# Altium PCB Transmitter_PCB.PcbDoc
Units mm, origin at the board's own origin, x right, y up, seen from the top; angles counter-clockwise.
Board outline 300 x 300 mm, 2 copper layers (Top Layer, Bottom Layer), stack 1.58 mm thick; 9 components, 18 nets, 53 pads, 20 vias.
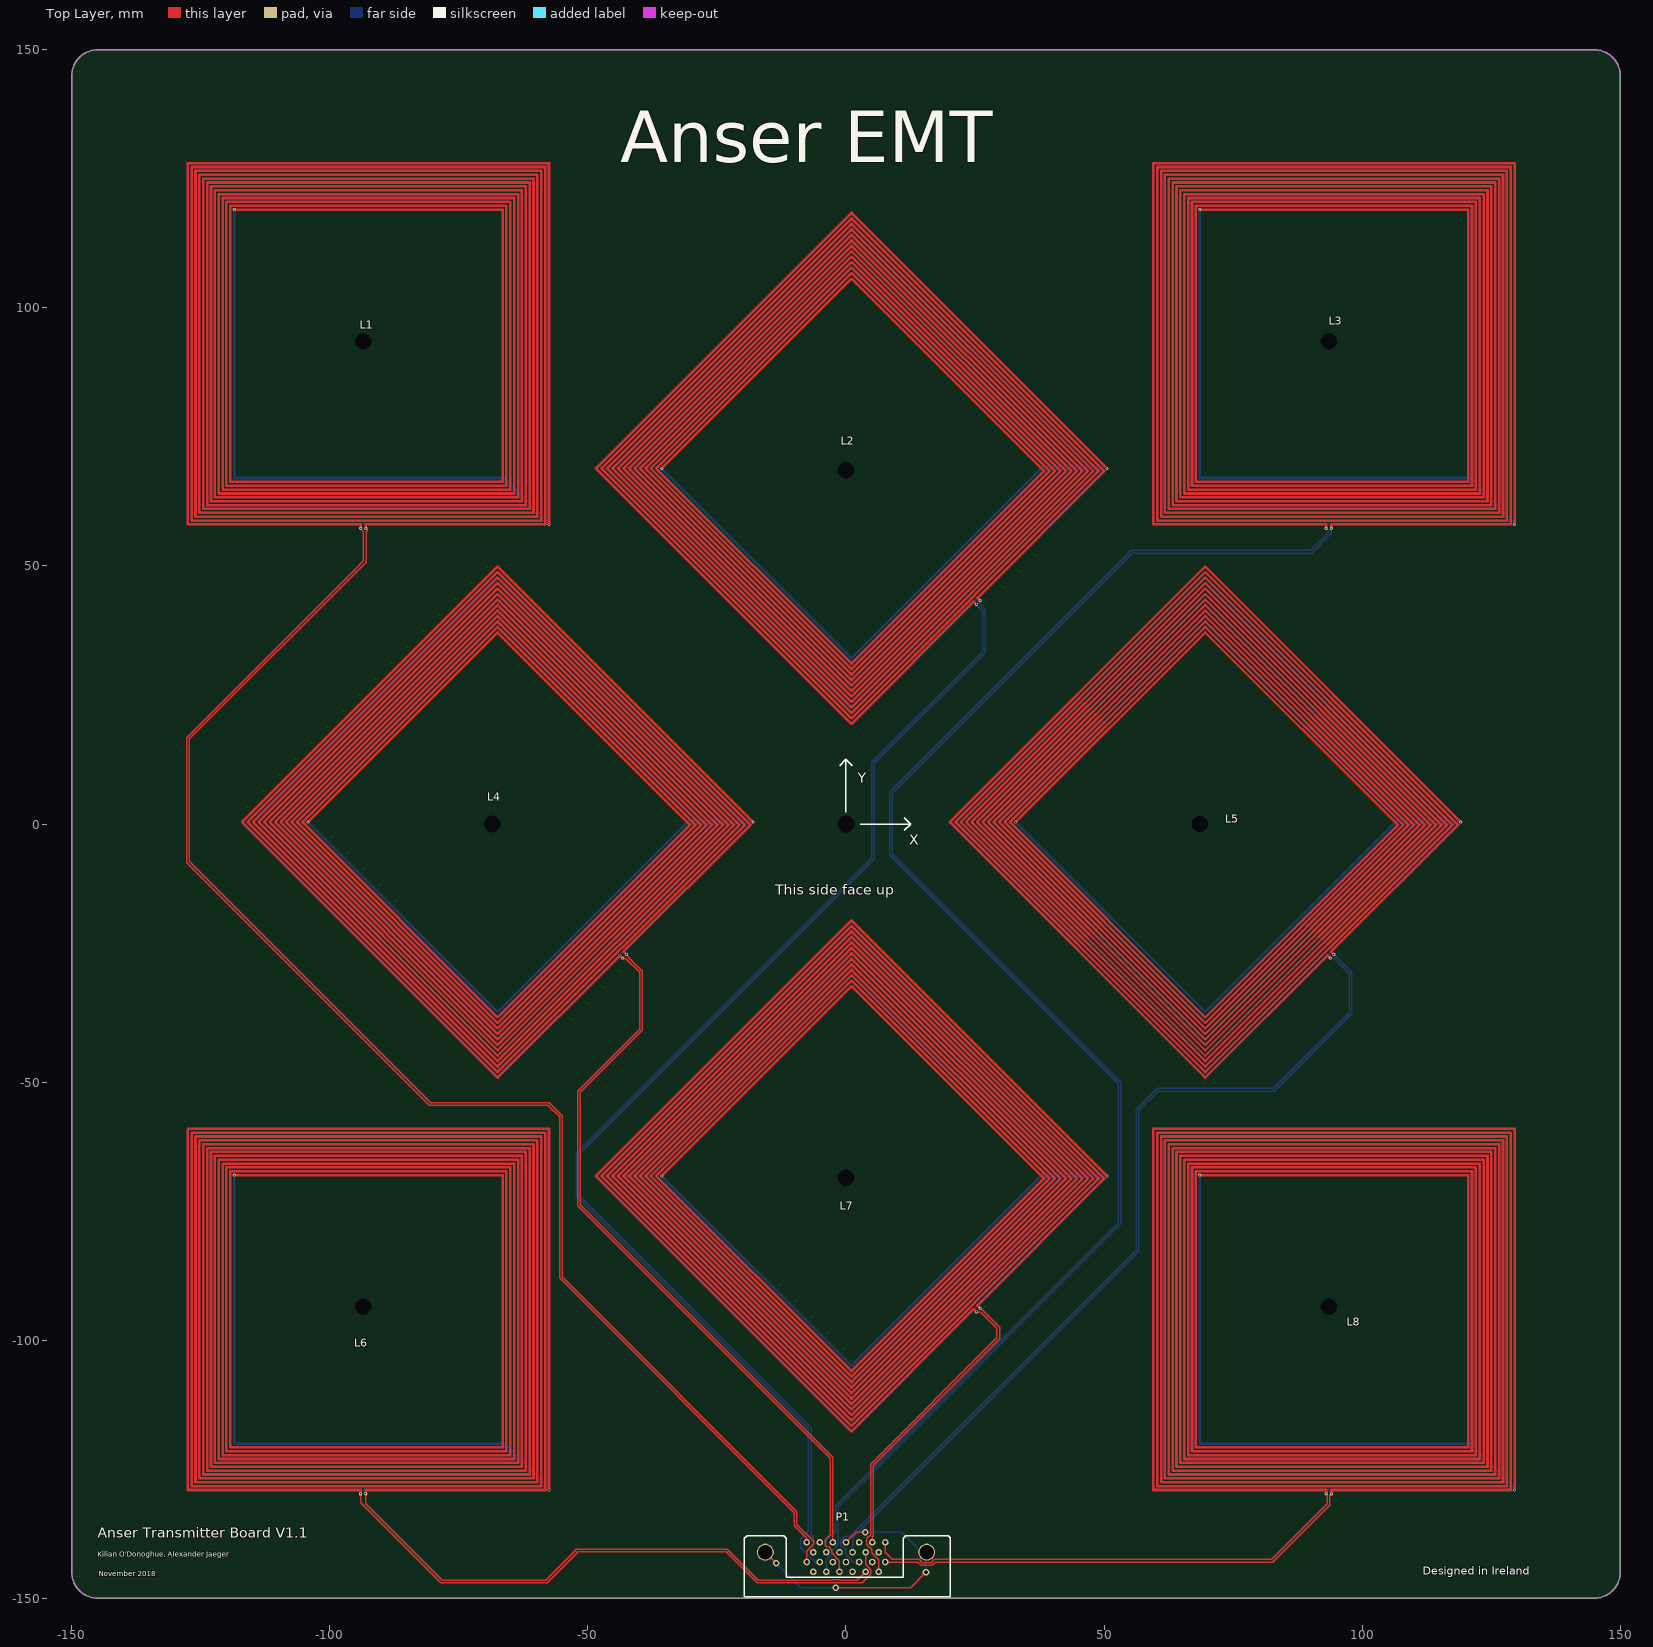
[diagram p0: Top Layer view]
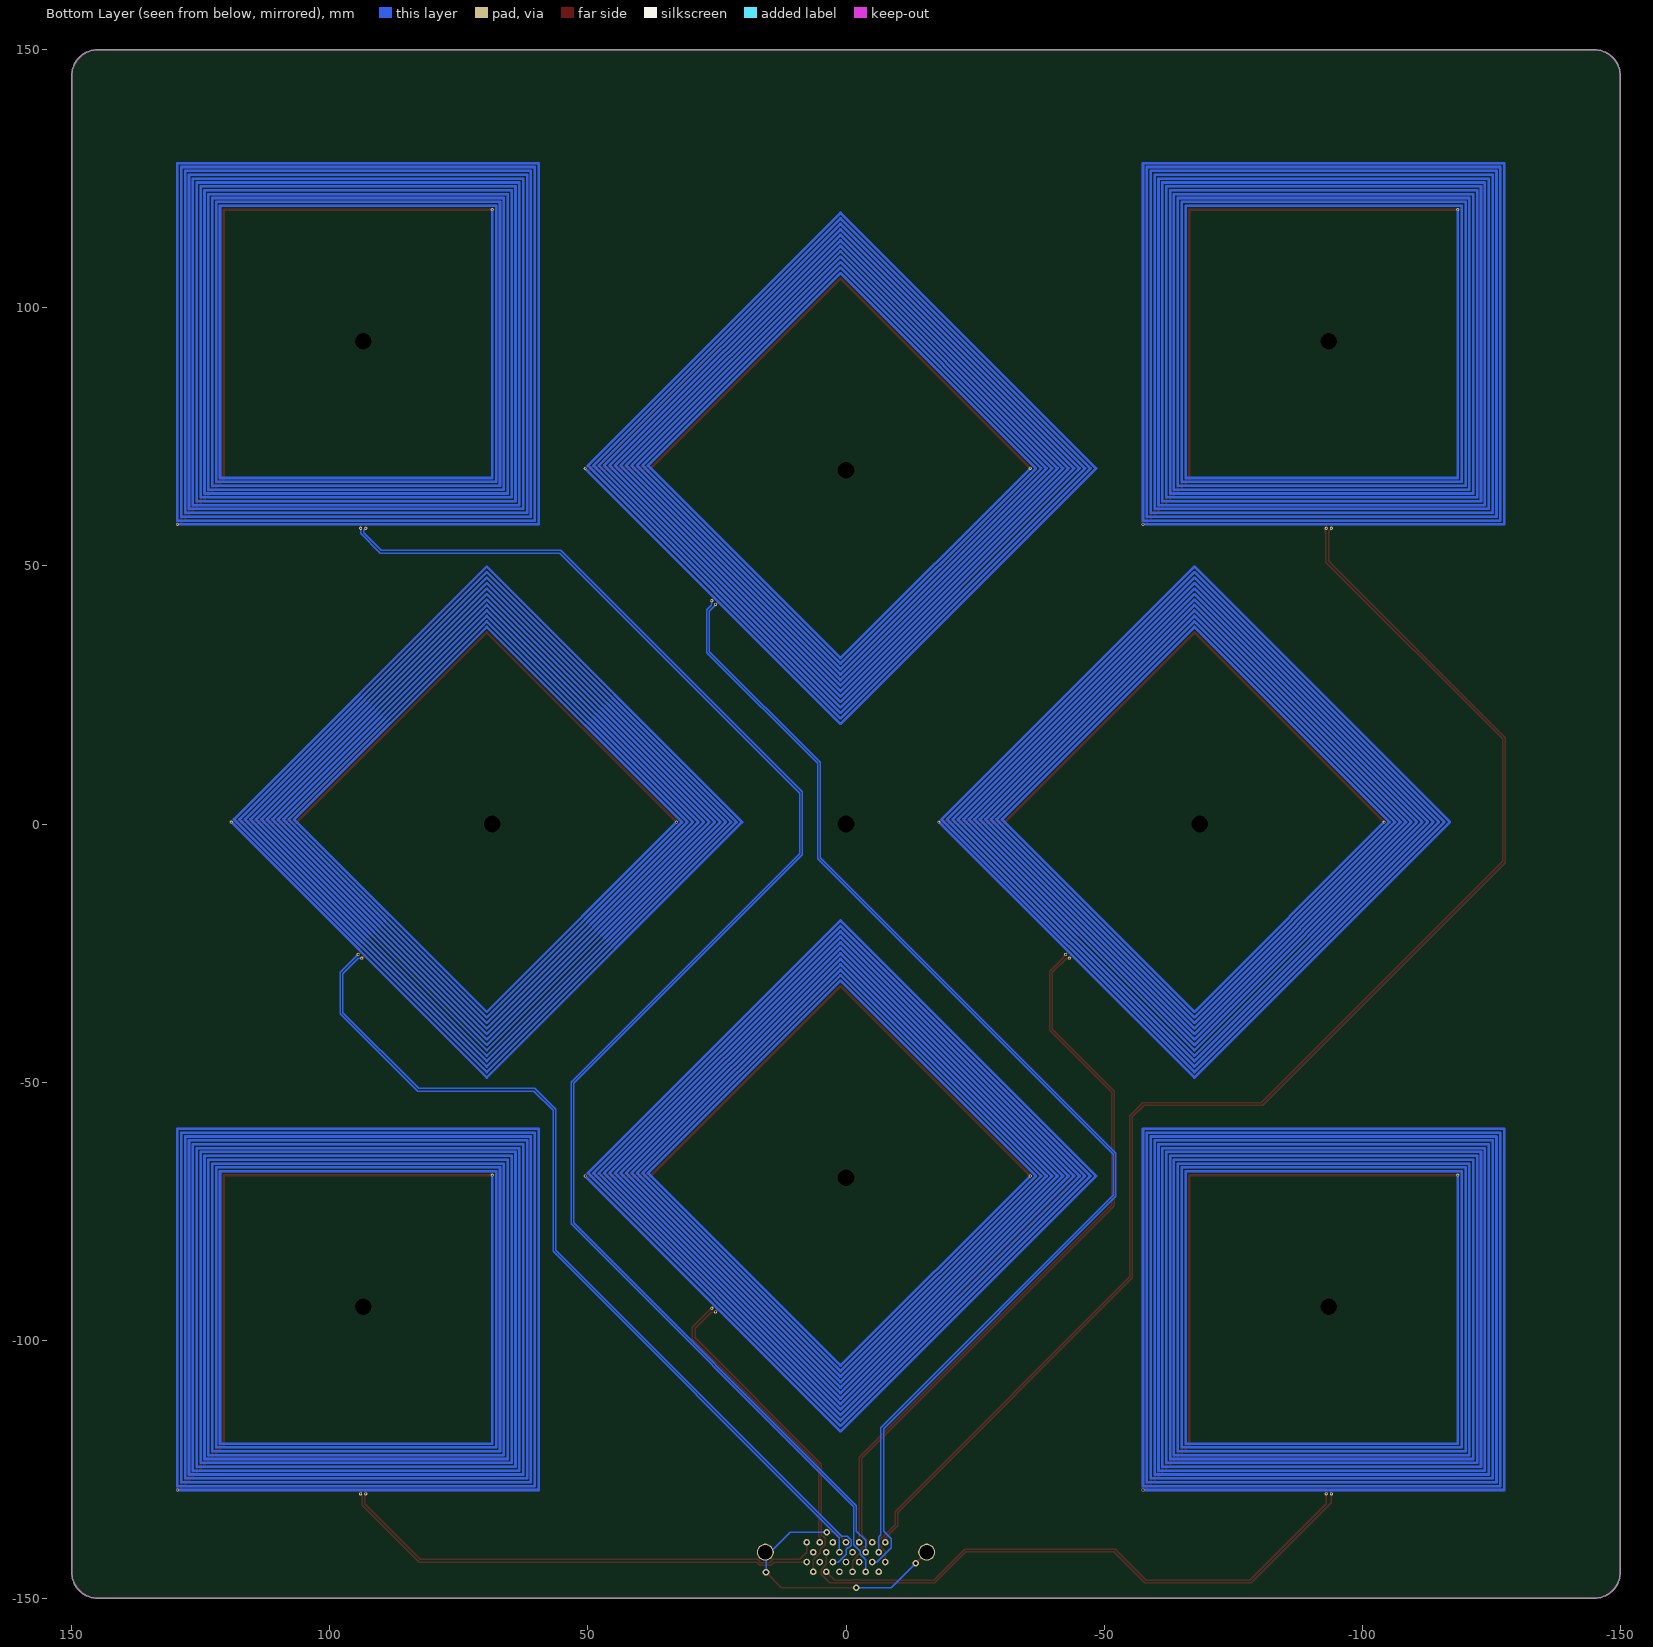
[diagram p1: Bottom Layer view, seen from below]

## Layer stack, top to bottom
Top Solder: solder mask 0.0102, Solder Resist, Dk 3.5
Top Layer: signal copper 0.0356
Dielectric 1: dielectric 1.5087, FR-4, Dk 4.8
Bottom Layer: signal copper 0.0356
Bottom Solder: solder mask 0.0102, Solder Resist, Dk 3.5

## Board outline
-145,-150 cw(c-145,-145) -150,-145 -150,145 cw(c-145,145) -145,150 145,150 cw(c145,145) 150,145 150,-145 cw(c145,-145) 145,-150

## Design rules (kind name [scope] priority, off if disabled: settings)
Clearance [All] p1: gap=0.254 ignorepadtopadclearanceinfootprint=FALSE except(0: Arc-Hole Track-Hole SMDPad-Hole THPad-Hole Via-Hole Fill-Hole Poly-Hole Region-Hole Text-Hole)
PolygonConnect [All] p1: connectstyle=Relief reliefconductorwidth=0.254 reliefentries=4 polygonreliefangle="90 Angle" airgapwidth=0.254
RoomDefinition Transmitter_PCB [InComponentClass('Transmitter_PCB')] p1: confinementstyle=ConfineIn formatcopy=TRUE lockcomponents=FALSE outline -175.4,-175.4 161.25,-175.4 161.25,161.5 -175.4,161.5
RoutingVias [All] p1: holewidth=0.711 width=1.27 viastyle="Through Hole" minholewidth=0.711 minwidth=1.27 maxholewidth=0.711 maxwidth=1.27
SolderMaskExpansion [All] p1: expansion=0.102
Width [All] p1: maxlimit=0.254 minlimit=0.254 preferedwidth=0.254
30 further rules are at their usual default settings.

## Components (designator, comment, footprint, x,y, rotation, side; value= is the part's Value field where it differs from the comment)
L1 "" TRANSMITTER_COIL_UCC_ORIGINAL -93.543,93.543 r0 top
L2 "" TRANSMITTER_COIL_UCC_ORIGINAL 0,68.55 r45 top
L3 "" TRANSMITTER_COIL_UCC_ORIGINAL 93.543,93.543 r0 top
L4 "" TRANSMITTER_COIL_UCC_ORIGINAL -68.55,0 r45 top
L5 "" TRANSMITTER_COIL_UCC_ORIGINAL 68.55,0 r45 top
L6 "" TRANSMITTER_COIL_UCC_ORIGINAL -93.543,-93.543 r0 top
L7 "" TRANSMITTER_COIL_UCC_ORIGINAL 0,-68.55 r45 top
L8 "" TRANSMITTER_COIL_UCC_ORIGINAL 93.543,-93.543 r0 top
P1 "Connector3M_26Pos" Connector_3M_26Pos 0,-143 r0 top

## Footprints (in the part's own frame and the unit in brackets; to place one, negate y for a bottom-side part, rotate by r counter-clockwise, add the part's x,y. Pads: shape width x height; smd on the part's side, far side on the other; paste and mask are expansions set on the pad)
Connector_3M_26Pos [mil] "Connector_3M_26Pos"
  round 130 hole 112: 0(615.5,75) 27(-615.5,75)
  round 50 hole 28: 1(300,150) 2(250,75) 3(200,150) 4(150,75) 5(100,150) 6(50,75) 7(0,150) 8(-50,75) 9(-100,150) 10(-150,75) 11(-200,150) 12(-250,75) 13(-300,150) 14(300,0) 15(250,-75) 16(200,0) 17(150,-75) 18(100,0) 19(50,-75) 20(0,0) 21(-50,-75) 22(-100,0) 23(-150,-75) 24(-200,0) 25(-250,-75) 26(-300,0)
  silkscreen extent -775,-265 795,200, body extent -730,-475 730,185, height 371
TRANSMITTER_COIL_UCC_ORIGINAL [mil] "Original 70mm coil, 0.5mm trace width, 0.25mm separation"
  round 24 hole 12: 1(19.68,-1427.17) 2(-19.69,-1427.17)
  Top Layer lines w19.68: -984.25,1003.94 1062.99,1003.94 1062.99,-1072.83 -1013.78,-1072.83 -1013.78,1033.46 1092.52,1033.46 1092.52,-1102.36 -1043.31,-1102.36 -1043.31,1062.99 1122.05,1062.99 1122.05,-1131.89 -1072.83,-1131.89 -1072.83,1092.52 1151.57,1092.52 1151.57,-1161.42 -1102.36,-1161.42 -1102.36,1122.05 1181.1,1122.05 1181.1,-1190.94 -1131.89,-1190.94 -1131.89,1151.57 1210.63,1151.57 1210.63,-1220.47 -1161.42,-1220.47 -1161.42,1181.1 1240.16,1181.1 1240.16,-1250 -1190.94,-1250 -1190.94,1210.63 1269.68,1210.63 1269.68,-1279.53 -1220.47,-1279.53 -1220.47,1240.16 1299.21,1240.16 1299.21,-1309.06 -1250,-1309.06 -1250,1269.68 1328.74,1269.68 1328.74,-1338.58 -1279.53,-1338.58 -1279.53,1299.21 1358.27,1299.21 1358.27,-1368.11 -1309.06,-1368.11 -1309.06,1328.74 1387.8,1328.74 1387.8,-1397.64 19.68,-1397.64 19.68,-1427.17 ; -19.69,-1427.17 -19.69,-1397.64 -1338.58,-1397.64 -1338.58,1358.27 1417.32,1358.27 1417.32,-1397.64
  Bottom Layer lines w19.68: -984.25,1003.94 -984.25,-1043.31 1092.52,-1043.31 1092.52,1033.46 -1013.78,1033.46 -1013.78,-1072.83 1122.05,-1072.83 1122.05,1062.99 -1043.31,1062.99 -1043.31,-1102.36 1151.57,-1102.36 1151.57,1092.52 -1072.83,1092.52 -1072.83,-1131.89 1181.1,-1131.89 1181.1,1122.05 -1102.36,1122.05 -1102.36,-1161.42 1210.63,-1161.42 1210.63,1151.57 -1131.89,1151.57 -1131.89,-1190.94 1240.16,-1190.94 1240.16,1181.1 -1161.42,1181.1 -1161.42,-1220.47 1269.68,-1220.47 1269.68,1210.63 -1190.94,1210.63 -1190.94,-1250 1299.21,-1250 1299.21,1240.16 -1220.47,1240.16 -1220.47,-1279.53 1328.74,-1279.53 1328.74,1269.68 -1250,1269.68 -1250,1250 -1250,-1309.06 1358.27,-1309.06 1358.27,1299.21 -1279.53,1299.21 -1279.53,-1338.58 1387.8,-1338.58 1387.8,1328.74 -1309.06,1328.74 -1309.06,-1368.11 1417.32,-1368.11 1417.32,1358.27 -1338.58,1358.27 -1338.58,-1397.64 1417.32,-1397.64

## Part data
L1 L2 L3 L4 L5 L6 L7 L8: library part TRANSMITTER_COIL_UCC_ORIGINAL, "TRANSMITTER_COIL_UCC_ORIGINAL"

## Free pads (board coordinates)
  round 0 hole 3.2: ""(-93.543,-93.543) ""(-93.543,93.543) ""(-68.55,0) ""(0,-68.55) ""(0,0) ""(0,68.55) ""(68.55,0) ""(93.543,-93.543) ""(93.543,93.543)

## Via types
v1: diameter 0.61, hole 0.305, Top Layer to Bottom Layer, 16 vias
v2: diameter 1.27, hole 0.711, Top Layer to Bottom Layer, 4 vias

## Nets (pads, with @x,y where several pads share a name; then routed paths per layer and width w, separated by ;. In a path a pad name is that pad's centre, name@x,y a point inside that pad or via, vN(x,y) a via of type N, cw(c..) or ccw(c..) an arc to the next point about the centre after c; other vN are vias at no path point)
CHANNEL_1_+: L1.2 P1.13 | length 274.1
  Top Layer w0.254: L1.2 -93.508,56.758 -93.508,51 -94.109,50.399 -94.109,50.359 -127.758,16.71 -127.758,-7.46 -80.71,-54.508 -57.75,-54.508 -55.508,-56.75 -55.508,-87.96 -10.008,-133.46 -10.008,-135.96 -7.62,-138.348 P1.13
  other v1: -57.543,58.043 -118.543,119.043
CHANNEL_1_-: L1.1 P1.26 | length 279
  Top Layer w0.254: L1.1 -92.782,57.032 -92.782,56.662 -93,56.662 -93,50.75 -127.25,16.5 -127.25,-7.25 -80.5,-54 -57.5,-54 -55,-56.5 -55,-87.75 -9.5,-133.25 -9.5,-135.75 -6.25,-139 -6.25,-139.5 -7.62,-140.87 P1.26
CHANNEL_2_+: L2.2 P1.24 | length 240
  Bottom Layer w0.254: P1.24 -6,-143 -8.75,-140.25 -8.75,-138.484 -7.266,-137 -7.266,-117.171 -52.266,-72.171 -52.266,-63.766 5,-6.5 5,11.937 26.484,33.421 26.484,41.25 25.279,42.455 L2.2
  other v1: -35.709,68.904 50.558,68.904
CHANNEL_2_-: L2.1 P1.12 | length 236.9
  Bottom Layer w0.254: P1.12@-6.695,-140.75 P1.12 -6.35,-138.158 -6.758,-137.75 -6.758,-116.96 -51.758,-71.96 -51.758,-63.976 5.508,-6.71 5.508,11.726 26.992,33.21 26.992,41.508 26.109,42.391 26.109,42.422 25.992,42.54 25.992,43.078 26.109,43.078 26.109,43.148 L2.1
CHANNEL_3_+: L3.2 P1.10 | length 295.9
  Bottom Layer w0.254: P1.10 -3.81,-138.81 -2.032,-137.032 -2.032,-132.064 52.742,-77.29 52.742,-50.21 8.492,-5.96 8.492,6.21 55.29,53.008 90.04,53.008 93.433,56.401 93.433,56.933 93.073,57.293 L3.2
  other v1: 129.543,58.043 68.543,119.043
CHANNEL_3_-: L3.1 P1.23 | length 299.7
  Bottom Layer w0.254: P1.23 -3.81,-142.532 -2.794,-141.516 -2.794,-140.881 -1.524,-139.611 -1.524,-132.274 53.25,-77.5 53.25,-50 9,-5.75 9,6 55.5,52.5 90.25,52.5 94.043,56.293 L3.1
CHANNEL_4_+: L4.2 P1.21 | length 147.5
  Top Layer w0.254: L4.2 -43.257,-26 -42.75,-26 -40.008,-28.742 -40.008,-39.79 -52.008,-51.79 -52.008,-73.96 -3.048,-122.92 -3.048,-137.75 -4,-138.702 -4,-139.75 -3.671,-140.079 -3.389,-140.079 -2.794,-140.674 -2.794,-141.206 -1.27,-142.73 P1.21
  other v1: -104.259,0.354 -17.992,0.354
CHANNEL_4_-: L4.1 P1.9 | length 140.4
  Top Layer w0.254: L4.1 -42.196,-25.647 -42.196,-25.804 -39.5,-28.5 -39.5,-40 -51.5,-52 -51.5,-73.75 -2.54,-122.71 P1.9
CHANNEL_5_+: L5.2 P1.18 | length 175.8
  Bottom Layer w0.254: P1.18 1.5,-143 0,-141.5 0,-140.5 -0.294,-140.206 -0.544,-140.206 -1.016,-139.734 -1.016,-138.753 -0.263,-138 0.845,-138 56.25,-82.595 56.25,-55.282 60.29,-51.242 82.79,-51.242 97.492,-36.54 97.492,-29 94.5,-26.008 94.5,-26 93.843,-26 L5.2
  other v1: 32.841,0.354 119.108,0.354
CHANNEL_5_-: L5.1 P1.6 | length 170.5
  Bottom Layer w0.254: P1.6 1.27,-138.293 56.758,-82.805 56.758,-55.492 60.5,-51.75 83,-51.75 98,-36.75 98,-28.743 L5.1
CHANNEL_6_+: L6.2 P1.4 | length 117.4
  Top Layer w0.254: L6.2@-94.027,-129.793 -94.027,-131.473 -78.492,-147.008 -57.923,-147.008 -52.075,-141.16 -52.075,-141 -23.25,-141 -17.242,-147.008 -2.445,-147.008 -2.421,-146.984 -1.579,-146.984 -1.555,-147.008 3.144,-147.008 4.826,-145.326 4.826,-144.484 3.81,-143.468 P1.4
CHANNEL_6_-: L6.1 P1.17 | length 110.6
  Top Layer w0.254: L6.1 -93.043,-131.707 -78.25,-146.5 -58.134,-146.5 -52.583,-140.949 -52.583,-140.79 -52.285,-140.492 -23.04,-140.492 -17.032,-146.5 -2.655,-146.5 -2.631,-146.476 -1.369,-146.476 -1.345,-146.5 2.215,-146.5 P1.17
  other v1: -57.543,-129.043 -118.543,-68.043
CHANNEL_7_+: L7.2 P1.15 | length 63.8
  Top Layer w0.254: P1.15 6.35,-142.6 5,-141.25 5,-140.547 4.064,-139.611 4.064,-138.373 4.766,-137.671 4.766,-124.016 29.242,-99.54 29.242,-97.71 26.141,-94.609 25.352,-94.609 L7.2
  other v1: -35.709,-68.196 50.558,-68.196
CHANNEL_7_-: L7.1 P1.3 | length 57.2
  Top Layer w0.254: P1.3 5.08,-138.075 5.274,-137.881 5.274,-124.226 29.75,-99.75 29.75,-97.5 26.079,-93.829 L7.1
CHANNEL_8_+: L8.2 P1.1 | length 95.1
  Top Layer w0.254: P1.1 7.62,-141.12 8.992,-142.492 14.157,-142.492 14.792,-143.127 16.475,-143.127 17.11,-142.492 82.508,-142.492 93.25,-131.75 93.25,-130 L8.2
CHANNEL_8_-: L8.1 P1.14 | length 93.5
  Top Layer w0.254: P1.14 13.947,-143 14.582,-143.635 16.686,-143.635 17.321,-143 82.718,-143 93.758,-131.96 93.758,-130.078 L8.1
  other v1: 129.543,-129.043 68.543,-68.043
GND: P1.0 P1.7 P1.27 | length 58.4
  Top Layer w0.254: P1.27 v2(-13.5,-143.229) ; v2(-2,-148) 12.5,-148 v2(15.5,-145) ; P1.7 1.94,-137.25 v2(3.75,-137.25)
  Bottom Layer w0.254: v2(-13.5,-143.229) -8.729,-148 v2(-2,-148) ; v2(3.75,-137.25) 10.789,-137.25 14.634,-141.095 P1.0 ; v2(15.5,-145) 15.5,-141.229 P1.0 ; P1.0@16.845,-141.095 P1.0
LED_ON: P1.20
pads on no net: P1.2 P1.5 P1.8 P1.11 P1.16 P1.19 P1.22 P1.25

## Keep-outs
Keep-Out Layer:
  lines w0.254: 150,145 ccw(c145,145) 145,150 -145,150 ccw(c-145,145) -150,145 -150,-145 ccw(c-145,-145) -145,-150 145,-150 ccw(c145,-145) 150,-145 150,145 ; 150,145 150,145

## Silkscreen, mask and mechanical layers (free items; w line width, h text height)
Top Overlay:
  lines w0.254: -1.25,11.25 0,12.5 ; 0,2.25 0,12.5 ; 1.25,11.25 0,12.5 ; 2.75,0 12.5,0 ; 11.25,-1.25 12.5,0 ; 11.25,1.25 12.5,0
  text "Anser EMT" at -43.75,128.25 h10
  text "Y" at 2.25,8 h2
  text "X" at 12.25,-4 h2
  text "This side face up" at -13.75,-13.75 h2
  text "Anser Transmitter Board V1.1" at -145,-138.25 h2
  text "Kilian O'Donoghue, Alexander Jaeger" at -145,-142 h1
  text "Designed in Ireland" at 111.75,-145.5 h1.52
  text "November 2018" at -144.75,-145.75 h1